# EAGLE board strip_charlie_30_save (EAGLE 5.11)
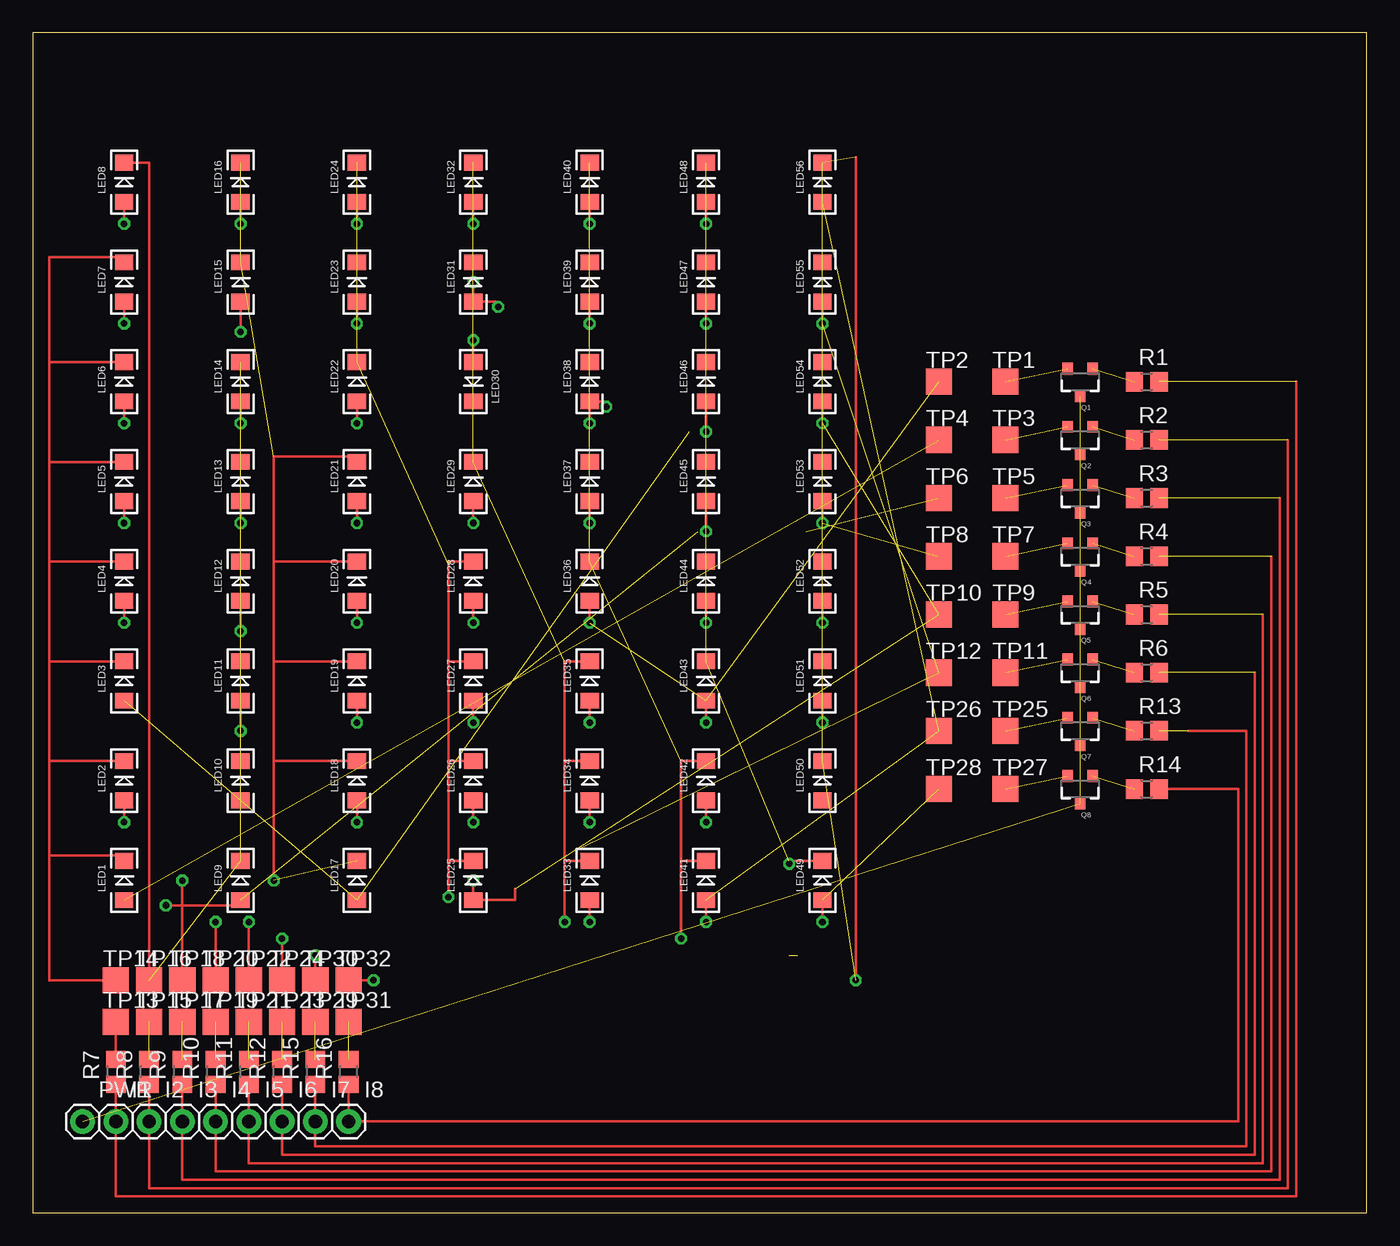
[diagram p0: board, top side]
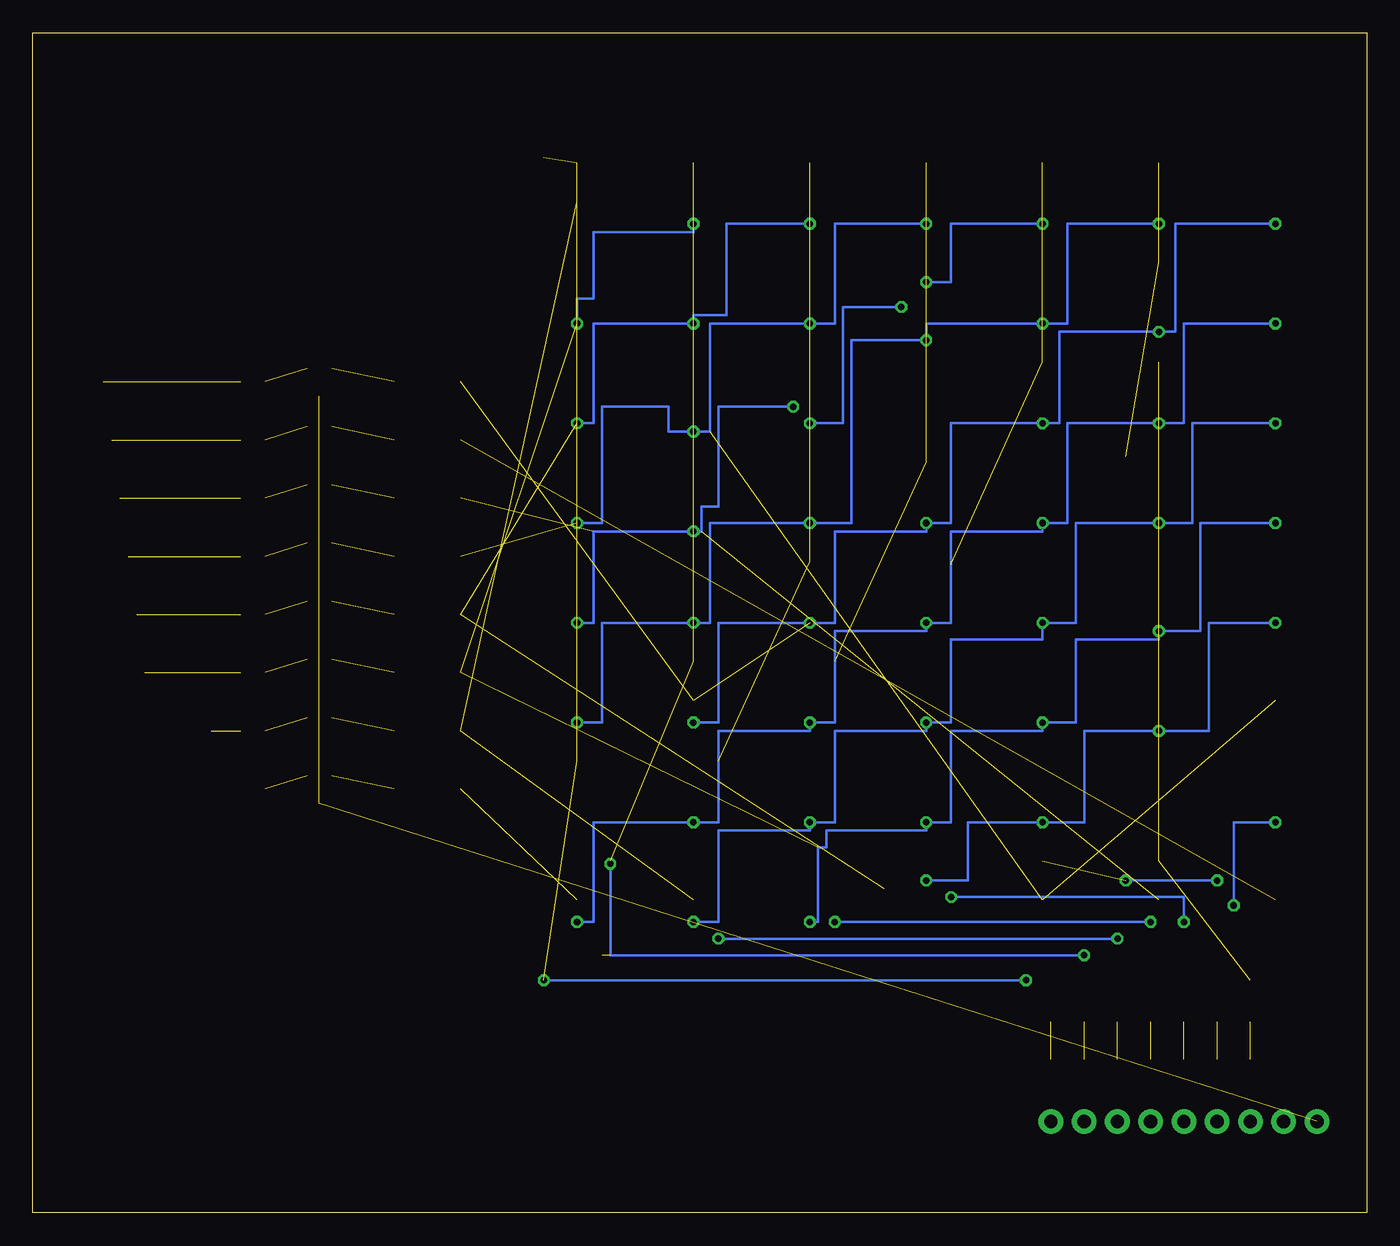
[diagram p1: board, bottom side, seen from below]

Size 101.91 x 90.16 mm. Coordinates in mm from the lower left corner, seen from the top.
Outline: 0,0 101.91,0 101.91,90.16 0,90.16 0,0
Copper layers (1*16): Top 0.035mm / dielectric 1.5mm / Bottom 0.035mm
Design rules "default *": minimum track width 8mil, minimum drill 20mil, track to track 8mil, track to pad 8mil, pad to pad 8mil, via to via 8mil, smd to smd 8mil, copper to edge 40mil, drill to drill 8mil, minimum pad ring 10mil, minimum via ring 8mil, stop-mask expansion 4mil, vias tented up to drill 0mil, thermal gap 10mil

## Footprints (pad centres in the part's own frame; a part is rotated, then mirrored left to right if it is on the bottom)
1X01 = drill 1.016 pad 1.88 round: 1 0,0
LED-1206 = smd 1.2 x 1.4: A -1.5,0; C 1.5,0
SOT23-3 = smd 0.8 x 0.9: 1 -0.95,-1; 2 0.95,-1; 3 0,1.1
R0805 = smd 1.3 x 1.5: 1 -0.95,0; 2 0.95,0
TP20SQ = smd 2 x 2: TP 0,0

## Placement (x,y rotation side)
I1  M01PTH  [1X01]  6.35,6.99 0 top
I2  M01PTH  [1X01]  8.89,6.99 0 top
I3  M01PTH  [1X01]  11.43,6.99 0 top
I4  M01PTH  [1X01]  13.97,6.99 0 top
I5  M01PTH  [1X01]  16.51,6.99 0 top
I6  M01PTH  [1X01]  19.05,6.99 0 top
I7  M01PTH  [1X01]  21.59,6.99 0 top
I8  M01PTH  [1X01]  24.13,6.99 0 top
LED1  [LED-1206]  6.99,25.4 90 top
LED2  [LED-1206]  6.99,33.02 90 top
LED3  [LED-1206]  6.99,40.64 90 top
LED4  [LED-1206]  6.99,48.26 90 top
LED5  [LED-1206]  6.99,55.88 90 top
LED6  [LED-1206]  6.99,63.5 90 top
LED7  [LED-1206]  6.99,71.12 90 top
LED8  [LED-1206]  6.99,78.74 90 top
LED9  [LED-1206]  15.88,25.4 90 top
LED10  [LED-1206]  15.88,33.02 90 top
LED11  [LED-1206]  15.88,40.64 90 top
LED12  [LED-1206]  15.88,48.26 90 top
LED13  [LED-1206]  15.88,55.88 90 top
LED14  [LED-1206]  15.88,63.5 90 top
LED15  [LED-1206]  15.88,71.12 90 top
LED16  [LED-1206]  15.88,78.74 90 top
LED17  [LED-1206]  24.77,25.4 90 top
LED18  [LED-1206]  24.77,33.02 90 top
LED19  [LED-1206]  24.77,40.64 90 top
LED20  [LED-1206]  24.77,48.26 90 top
LED21  [LED-1206]  24.77,55.88 90 top
LED22  [LED-1206]  24.77,63.5 90 top
LED23  [LED-1206]  24.77,71.12 90 top
LED24  [LED-1206]  24.77,78.74 90 top
LED25  [LED-1206]  33.66,25.4 90 top
LED26  [LED-1206]  33.66,33.02 90 top
LED27  [LED-1206]  33.66,40.64 90 top
LED28  [LED-1206]  33.66,48.26 90 top
LED29  [LED-1206]  33.66,55.88 90 top
LED30  [LED-1206]  33.66,63.5 270 top
LED31  [LED-1206]  33.66,71.12 90 top
LED32  [LED-1206]  33.66,78.74 90 top
LED33  [LED-1206]  42.55,25.4 90 top
LED34  [LED-1206]  42.55,33.02 90 top
LED35  [LED-1206]  42.55,40.64 90 top
LED36  [LED-1206]  42.55,48.26 90 top
LED37  [LED-1206]  42.55,55.88 90 top
LED38  [LED-1206]  42.55,63.5 90 top
LED39  [LED-1206]  42.55,71.12 90 top
LED40  [LED-1206]  42.55,78.74 90 top
LED41  [LED-1206]  51.44,25.4 90 top
LED42  [LED-1206]  51.44,33.02 90 top
LED43  [LED-1206]  51.44,40.64 90 top
LED44  [LED-1206]  51.44,48.26 90 top
LED45  [LED-1206]  51.44,55.88 90 top
LED46  [LED-1206]  51.44,63.5 90 top
LED47  [LED-1206]  51.44,71.12 90 top
LED48  [LED-1206]  51.44,78.74 90 top
LED49  [LED-1206]  60.33,25.4 90 top
LED50  [LED-1206]  60.33,33.02 90 top
LED51  [LED-1206]  60.33,40.64 90 top
LED52  [LED-1206]  60.33,48.26 90 top
LED53  [LED-1206]  60.33,55.88 90 top
LED54  [LED-1206]  60.33,63.5 90 top
LED55  [LED-1206]  60.33,71.12 90 top
LED56  [LED-1206]  60.33,78.74 90 top
PWR  M01PTH  [1X01]  3.81,6.99 0 top
Q1  [SOT23-3]  80.01,63.5 180 top
Q2  [SOT23-3]  80.01,59.05 180 top
Q3  [SOT23-3]  80.01,54.61 180 top
Q4  [SOT23-3]  80.01,50.16 180 top
Q5  [SOT23-3]  80.01,45.72 180 top
Q6  [SOT23-3]  80.01,41.27 180 top
Q7  [SOT23-3]  80.01,36.83 180 top
Q8  [SOT23-3]  80.01,32.38 180 top
R1  [R0805]  85.09,63.5 0 top
R2  [R0805]  85.09,59.05 0 top
R3  [R0805]  85.09,54.61 0 top
R4  [R0805]  85.09,50.16 0 top
R5  [R0805]  85.09,45.72 0 top
R6  [R0805]  85.09,41.27 0 top
R7  [R0805]  6.35,10.79 90 top
R8  [R0805]  8.89,10.79 90 top
R9  [R0805]  11.43,10.79 90 top
R10  [R0805]  13.97,10.79 90 top
R11  [R0805]  16.51,10.79 90 top
R12  [R0805]  19.05,10.79 90 top
R13  [R0805]  85.09,36.83 0 top
R14  [R0805]  85.09,32.38 0 top
R15  [R0805]  21.59,10.79 90 top
R16  [R0805]  24.13,10.79 90 top
TP1  TPSQTP20SQ  [TP20SQ]  74.3,63.5 0 top
TP2  TPSQTP20SQ  [TP20SQ]  69.22,63.5 0 top
TP3  TPSQTP20SQ  [TP20SQ]  74.3,59.05 0 top
TP4  TPSQTP20SQ  [TP20SQ]  69.22,59.05 0 top
TP5  TPSQTP20SQ  [TP20SQ]  74.3,54.61 0 top
TP6  TPSQTP20SQ  [TP20SQ]  69.22,54.61 0 top
TP7  TPSQTP20SQ  [TP20SQ]  74.3,50.16 0 top
TP8  TPSQTP20SQ  [TP20SQ]  69.22,50.16 0 top
TP9  TPSQTP20SQ  [TP20SQ]  74.3,45.72 0 top
TP10  TPSQTP20SQ  [TP20SQ]  69.22,45.72 0 top
TP11  TPSQTP20SQ  [TP20SQ]  74.3,41.27 0 top
TP12  TPSQTP20SQ  [TP20SQ]  69.22,41.27 0 top
TP13  TPSQTP20SQ  [TP20SQ]  6.35,14.61 0 top
TP14  TPSQTP20SQ  [TP20SQ]  6.35,17.78 0 top
TP15  TPSQTP20SQ  [TP20SQ]  8.89,14.61 0 top
TP16  TPSQTP20SQ  [TP20SQ]  8.89,17.78 0 top
TP17  TPSQTP20SQ  [TP20SQ]  11.43,14.61 0 top
TP18  TPSQTP20SQ  [TP20SQ]  11.43,17.78 0 top
TP19  TPSQTP20SQ  [TP20SQ]  13.97,14.61 0 top
TP20  TPSQTP20SQ  [TP20SQ]  13.97,17.78 0 top
TP21  TPSQTP20SQ  [TP20SQ]  16.51,14.61 0 top
TP22  TPSQTP20SQ  [TP20SQ]  16.51,17.78 0 top
TP23  TPSQTP20SQ  [TP20SQ]  19.05,14.61 0 top
TP24  TPSQTP20SQ  [TP20SQ]  19.05,17.78 0 top
TP25  TPSQTP20SQ  [TP20SQ]  74.3,36.83 0 top
TP26  TPSQTP20SQ  [TP20SQ]  69.22,36.83 0 top
TP27  TPSQTP20SQ  [TP20SQ]  74.3,32.38 0 top
TP28  TPSQTP20SQ  [TP20SQ]  69.22,32.38 0 top
TP29  TPSQTP20SQ  [TP20SQ]  21.59,14.61 0 top
TP30  TPSQTP20SQ  [TP20SQ]  21.59,17.78 0 top
TP31  TPSQTP20SQ  [TP20SQ]  24.13,14.61 0 top
TP32  TPSQTP20SQ  [TP20SQ]  24.13,17.78 0 top
U$1  FHI_LOGO  [FHI_LOGO]  -15.24,48.26 0 top  (outside the outline)

## Library data of the parts
I1-I8 PWR Q1-Q8 = SparkFun
LED1-LED56 R1-R16 TP1-TP32 U$1 = CyberRailGuru

## Nets
N$1: Q7.1 R13.1
N$2: Q8.1 R14.1
N$11: Q6.1 R6.1
N$14: LED16.A LED23.A LED30.A LED37.A LED44.A LED51.A
N$15: Q1.1 R1.1
N$16: Q2.1 R2.1
N$17: Q3.1 R3.1
N$18: Q4.1 R4.1
N$19: Q5.1 R5.1
OUT1: I1.1 R1.2 R7.1
OUT1_1: Q1.2 TP1.TP
OUT1_2: LED8.A LED15.A LED22.A LED29.A LED36.A LED43.A LED50.A TP2.TP
OUT1_3: R7.2 TP13.TP
OUT1_4: LED1.C LED2.C LED3.C LED4.C LED5.C LED6.C LED7.C TP14.TP
OUT2: I2.1 R2.2 R8.1
OUT2_1: Q2.2 TP3.TP
OUT2_2: LED1.A TP4.TP
OUT2_3: R8.2 TP15.TP
OUT2_4: LED8.C LED9.C LED10.C LED11.C LED12.C LED13.C LED14.C TP16.TP
OUT3: I3.1 R3.2 R9.1
OUT3_1: Q3.2 TP5.TP
OUT3_2: LED2.A LED9.A LED24.A LED31.A LED38.A LED45.A LED52.A TP6.TP
OUT3_3: R9.2 TP17.TP
OUT3_4: LED15.C LED16.C LED17.C LED18.C LED19.C LED20.C LED21.C TP18.TP
OUT4: I4.1 R4.2 R10.1
OUT4_1: Q4.2 TP7.TP
OUT4_2: LED3.A LED10.A LED17.A LED32.A LED39.A LED46.A LED53.A TP8.TP
OUT4_3: R10.2 TP19.TP
OUT4_4: LED22.C LED23.C LED24.C LED25.C LED26.C LED27.C LED28.C TP20.TP
OUT5: I5.1 R5.2 R11.1
OUT5_1: Q5.2 TP9.TP
OUT5_2: LED4.A LED11.A LED18.A LED25.A LED40.A LED47.A LED54.A TP10.TP
OUT5_3: R11.2 TP21.TP
OUT5_4: LED29.C LED30.C LED31.C LED32.C LED33.C LED34.C LED35.C TP22.TP
OUT6: I6.1 R6.2 R12.1
OUT6_1: Q6.2 TP11.TP
OUT6_2: LED5.A LED12.A LED19.A LED26.A LED33.A LED48.A LED55.A TP12.TP
OUT6_3: R12.2 TP23.TP
OUT6_4: LED36.C LED37.C LED38.C LED39.C LED40.C LED41.C LED42.C TP24.TP
OUT7: I7.1 R13.2 R15.1
OUT7_1: Q7.2 TP25.TP
OUT7_2: LED6.A LED13.A LED20.A LED27.A LED34.A LED41.A LED56.A TP26.TP
OUT7_3: R15.2 TP29.TP
OUT7_4: LED43.C LED44.C LED45.C LED46.C LED47.C LED48.C LED49.C TP30.TP
OUT8: I8.1 R14.2 R16.1
OUT8_1: Q8.2 TP27.TP
OUT8_2: LED7.A LED14.A LED21.A LED28.A LED35.A LED42.A LED49.A TP28.TP
OUT8_3: R16.2 TP31.TP
OUT8_4: LED50.C LED51.C LED52.C LED53.C LED54.C LED55.C LED56.C TP32.TP
VCC: PWR.1 Q1.3 Q2.3 Q3.3 Q4.3 Q5.3 Q6.3 Q7.3 Q8.3

## Tracks (layer width: path | path; a pad name or v marks a point on that pad's centre or on a via)
N$1  (1 unrouted)
N$2  (1 unrouted)
N$11  (1 unrouted)
N$14  (via drill 0.5)
  Top 0.203: v15.88,75.56 LED16.A | v24.77,67.94 LED23.A | v33.66,66.67 LED30.A | v42.55,52.7 LED37.A | v51.44,45.09 LED44.A | v60.33,37.47 LED51.A
  Bottom 0.203: v15.88,75.56 22.86,75.56 22.86,67.94 v24.77,67.94 33.66,67.94 v33.66,66.67 39.37,66.67 39.37,52.7 v42.55,52.7 50.16,52.7 50.16,45.09 v51.44,45.09 58.42,45.09 58.42,37.47 v60.33,37.47
N$15  (1 unrouted)
N$16  (1 unrouted)
N$17  (1 unrouted)
N$18  (1 unrouted)
N$19  (1 unrouted)
OUT1  (1 unrouted)
  Top 0.203: I1.1 R7.1 6.35,1.27 96.52,1.27 96.52,63.5
OUT1_1  (1 unrouted)
OUT1_2  (via drill 0.5)  (2 unrouted)
  Top 0.203: v6.99,75.56 LED8.A | v15.88,67.31 LED15.A | v24.77,60.33 LED22.A | v33.66,52.7 LED29.A | v42.55,45.09 LED36.A | v51.44,37.47 LED43.A
  Bottom 0.203: v6.99,75.56 14.61,75.56 14.61,67.31 v15.88,67.31 23.5,67.31 23.5,60.33 v24.77,60.33 31.75,60.33 31.75,52.7 v33.66,52.7 33.66,52.07 40.64,52.07 40.64,45.09 v42.55,45.09 49.53,45.09 49.53,37.47 v51.44,37.47
OUT1_3
  Top 0.203: R7.2 TP13.TP
OUT1_4
  Top 0.203: 3.17,17.78 TP14.TP 1.27,17.78 1.27,27.3 | 1.27,27.3 1.27,34.52 | 1.27,57.38 1.27,65 | LED7.C 6.99,73.03 1.27,73.03 1.27,65 | 1.27,65 LED6.C | 1.27,57.38 LED5.C | 1.27,49.76 1.27,57.38 | 1.27,49.76 LED4.C | 1.27,42.14 1.27,49.76 | 1.27,42.14 LED3.C | 1.27,34.52 LED2.C | 1.27,34.52 1.27,42.14 | LED1.C 6.99,27.3 1.27,27.3
OUT2  (1 unrouted)
  Top 0.203: I2.1 R8.1 8.89,1.91 95.89,1.91 95.89,59.05
OUT2_1  (1 unrouted)
OUT2_2  (1 unrouted)
OUT2_3  (1 unrouted)
OUT2_4  (6 unrouted)
  Top 0.203: LED8.C 8.89,80.24 TP16.TP
OUT3  (1 unrouted)
  Top 0.203: I3.1 R9.1 11.43,2.54 95.25,2.54 95.25,54.61
OUT3_1  (1 unrouted)
OUT3_2  (via drill 0.5)  (2 unrouted)
  Top 0.203: v24.77,75.56 LED24.A | v33.66,71.12 LED31.A 35.56,69.62 v35.56,69.22 | v42.55,60.33 LED38.A 43.81,62 v43.81,61.59 | v51.44,52.07 LED45.A | v60.33,45.09 LED52.A | LED2.A v6.99,29.84 | v10.16,23.5 15.88,23.5 LED9.A
  Bottom 0.203: v24.77,75.56 31.75,75.56 31.75,71.12 v33.66,71.12 | v35.56,69.22 40.01,69.22 40.01,60.33 v42.55,60.33 | v43.81,61.59 49.53,61.59 49.53,53.98 50.8,53.98 50.8,52.07 v51.44,52.07 59.05,52.07 59.05,45.09 v60.33,45.09 | v6.99,29.84 10.16,29.84 v10.16,23.5
OUT3_3  (1 unrouted)
OUT3_4  (via drill 0.5)  (3 unrouted)
  Top 0.203: TP18.TP v11.43,25.4 | v18.41,25.4 18.41,34.29 18.41,34.52 | 18.41,49.76 18.41,57.78 24.77,57.78 LED21.C | 18.41,49.76 LED20.C | 18.41,42.14 18.41,49.76 | 18.41,42.14 LED19.C | 18.41,34.52 18.41,42.14 | 18.41,34.52 LED18.C
  Bottom 0.203: v11.43,25.4 v18.41,25.4
OUT4  (1 unrouted)
  Top 0.203: I4.1 R10.1 13.97,3.17 94.61,3.17 94.61,50.16
OUT4_1  (1 unrouted)
OUT4_2  (via drill 0.5)  (4 unrouted)
  Top 0.203: v60.33,52.7 LED53.A | v51.44,59.69 LED46.A | v42.55,67.94 LED39.A | v33.66,75.56 LED32.A
  Bottom 0.203: v60.33,52.7 58.42,52.7 58.42,61.59 53.34,61.59 53.34,59.69 v51.44,59.69 50.16,59.69 50.16,67.94 v42.55,67.94 40.64,67.94 40.64,75.56 v33.66,75.56
OUT4_3  (1 unrouted)
OUT4_4  (via drill 0.5)  (4 unrouted)
  Top 0.203: TP20.TP v13.97,22.23 | v31.75,24.13 31.75,26.9 | 31.75,34.52 LED26.C | 31.75,26.9 LED25.C | 31.75,26.9 31.75,34.52 | 31.75,42.14 LED27.C | 31.75,34.52 31.75,42.14 | LED28.C 31.75,49.76 31.75,42.14
  Bottom 0.203: v13.97,22.23 13.97,24.13 v31.75,24.13
OUT5  (1 unrouted)
  Top 0.203: I5.1 R11.1 16.51,3.81 93.98,3.81 93.98,45.72
OUT5_1  (1 unrouted)
OUT5_2  (via drill 0.5)  (2 unrouted)
  Top 0.203: v6.99,45.09 LED4.A | v15.88,36.83 LED11.A | v24.77,29.84 LED18.A | v33.66,25.4 LED25.A 36.83,23.9 36.83,24.77 | v42.55,75.56 LED40.A | v51.44,67.94 LED47.A | v60.33,60.33 LED54.A
  Bottom 0.203: v6.99,45.09 12.06,45.09 12.06,36.83 v15.88,36.83 21.59,36.83 21.59,29.84 v24.77,29.84 30.48,29.84 30.48,25.4 v33.66,25.4 | v42.55,75.56 48.9,75.56 48.9,68.58 51.44,68.58 v51.44,67.94 59.05,67.94 59.05,60.33 v60.33,60.33
OUT5_3  (1 unrouted)
OUT5_4  (via drill 0.5)  (4 unrouted)
  Top 0.203: TP22.TP v16.51,22.23 | v40.64,22.23 40.64,26.9 | 40.64,34.52 40.64,27.3 40.64,26.9 | LED35.C 40.64,42.14 40.64,34.52 | 40.64,34.52 LED34.C | 40.64,26.9 LED33.C
  Bottom 0.203: v16.51,22.23 v40.64,22.23
OUT6  (1 unrouted)
  Top 0.203: I6.1 R12.1 19.05,4.45 93.34,4.45 93.34,41.27
OUT6_1  (1 unrouted)
OUT6_2  (via drill 0.5)  (2 unrouted)
  Top 0.203: v6.99,52.7 LED5.A | v15.88,44.45 LED12.A | v24.77,37.47 LED19.A | v33.66,29.84 LED26.A | v42.55,22.23 LED33.A | v60.33,67.94 LED55.A | v51.44,75.56 LED48.A
  Bottom 0.203: v6.99,52.7 12.7,52.7 12.7,44.45 v15.88,44.45 15.88,43.81 22.23,43.81 22.23,37.47 v24.77,37.47 24.77,36.83 31.75,36.83 31.75,29.84 v33.66,29.84 33.66,29.21 41.27,29.21 41.27,27.94 41.91,27.94 41.91,22.23 v42.55,22.23 | v60.33,67.94 60.33,69.85 59.05,69.85 59.05,74.93 51.44,74.93 v51.44,75.56
OUT6_3  (1 unrouted)
OUT6_4  (via drill 0.5)  (5 unrouted)
  Top 0.203: TP24.TP v19.05,20.95 | LED42.C 49.53,34.52 49.53,26.9 | v49.53,20.95 49.53,26.67 49.53,26.9 | 49.53,26.9 LED41.C
  Bottom 0.203: v19.05,20.95 v49.53,20.95
OUT7  (1 unrouted)
  Top 0.203: I7.1 R15.1 21.59,5.08 92.71,5.08 92.71,36.83 88.27,36.83
OUT7_1  (1 unrouted)
OUT7_2  (via drill 0.5)  (2 unrouted)
  Top 0.203: v6.99,60.33 LED6.A | v15.88,52.7 LED13.A | v24.77,45.09 LED20.A | v33.66,37.47 LED27.A | v42.55,29.84 LED34.A | LED41.A v51.44,22.23
  Bottom 0.203: v6.99,60.33 13.34,60.33 13.34,52.7 v15.88,52.7 22.23,52.7 22.23,45.09 v24.77,45.09 24.77,43.81 31.75,43.81 31.75,37.47 v33.66,37.47 33.66,36.83 40.64,36.83 40.64,29.84 v42.55,29.84 42.55,29.21 49.53,29.21 49.53,22.23 v51.44,22.23
OUT7_3  (1 unrouted)
OUT7_4  (via drill 0.5)  (7 unrouted)
  Top 0.203: TP30.TP v21.59,19.68 | LED49.C 57.78,26.9 v57.78,26.67
  Bottom 0.203: v21.59,19.68 57.78,19.68 v57.78,26.67
OUT8
  Top 0.203: R16.1 I8.1 92.08,6.99 92.08,32.38 R14.2
OUT8_1  (1 unrouted)
OUT8_2  (via drill 0.5)  (1 unrouted)
  Top 0.203: v6.99,67.94 LED7.A | v15.88,60.33 LED14.A | v24.77,52.7 LED21.A | v33.66,45.09 LED28.A | v42.55,37.47 LED35.A | v51.44,29.84 LED42.A | LED49.A v60.33,22.23
  Bottom 0.203: v6.99,67.94 13.97,67.94 13.97,60.33 v15.88,60.33 22.86,60.33 22.86,52.7 v24.77,52.7 24.77,52.07 31.75,52.07 31.75,45.09 v33.66,45.09 33.66,44.45 40.64,44.45 40.64,37.47 v42.55,37.47 42.55,36.83 49.53,36.83 49.53,29.84 v51.44,29.84 59.05,29.84 59.05,22.23 v60.33,22.23
OUT8_3  (1 unrouted)
OUT8_4  (via drill 0.5)  (8 unrouted)
  Top 0.203: TP32.TP v26.04,17.78 | v62.87,17.78 62.87,80.64
  Bottom 0.203: v26.04,17.78 v62.87,17.78
VCC  (8 unrouted)